# EAGLE board homeboard17 (EAGLE 6.0)
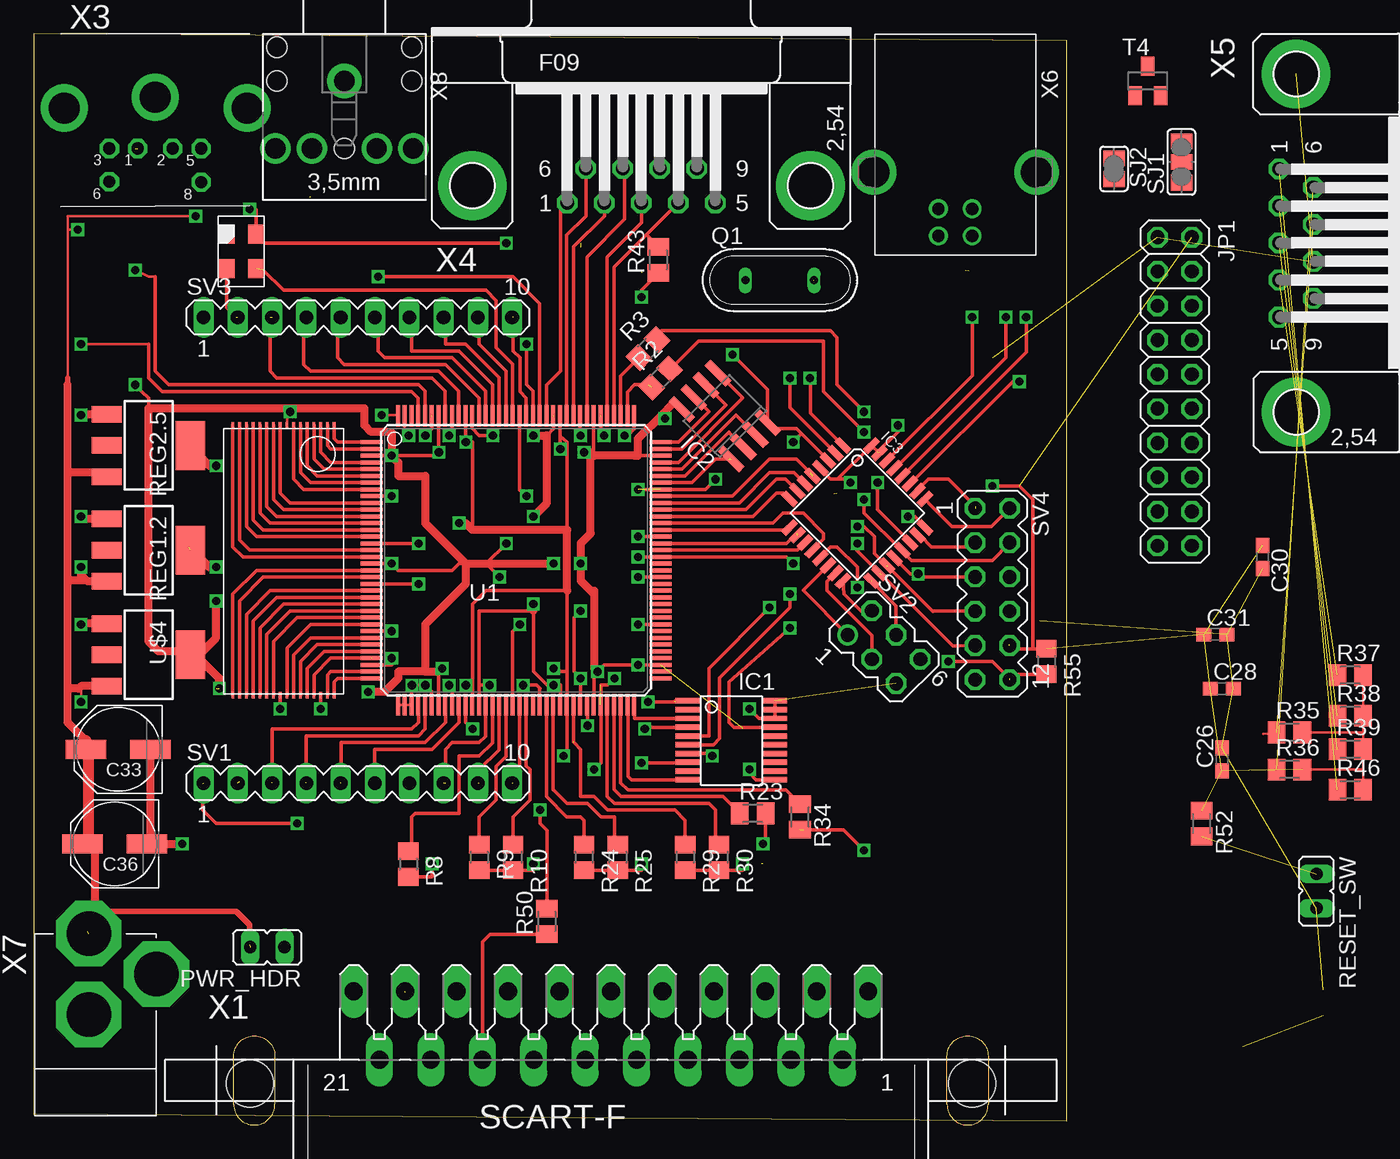
[diagram p0: board, top side]
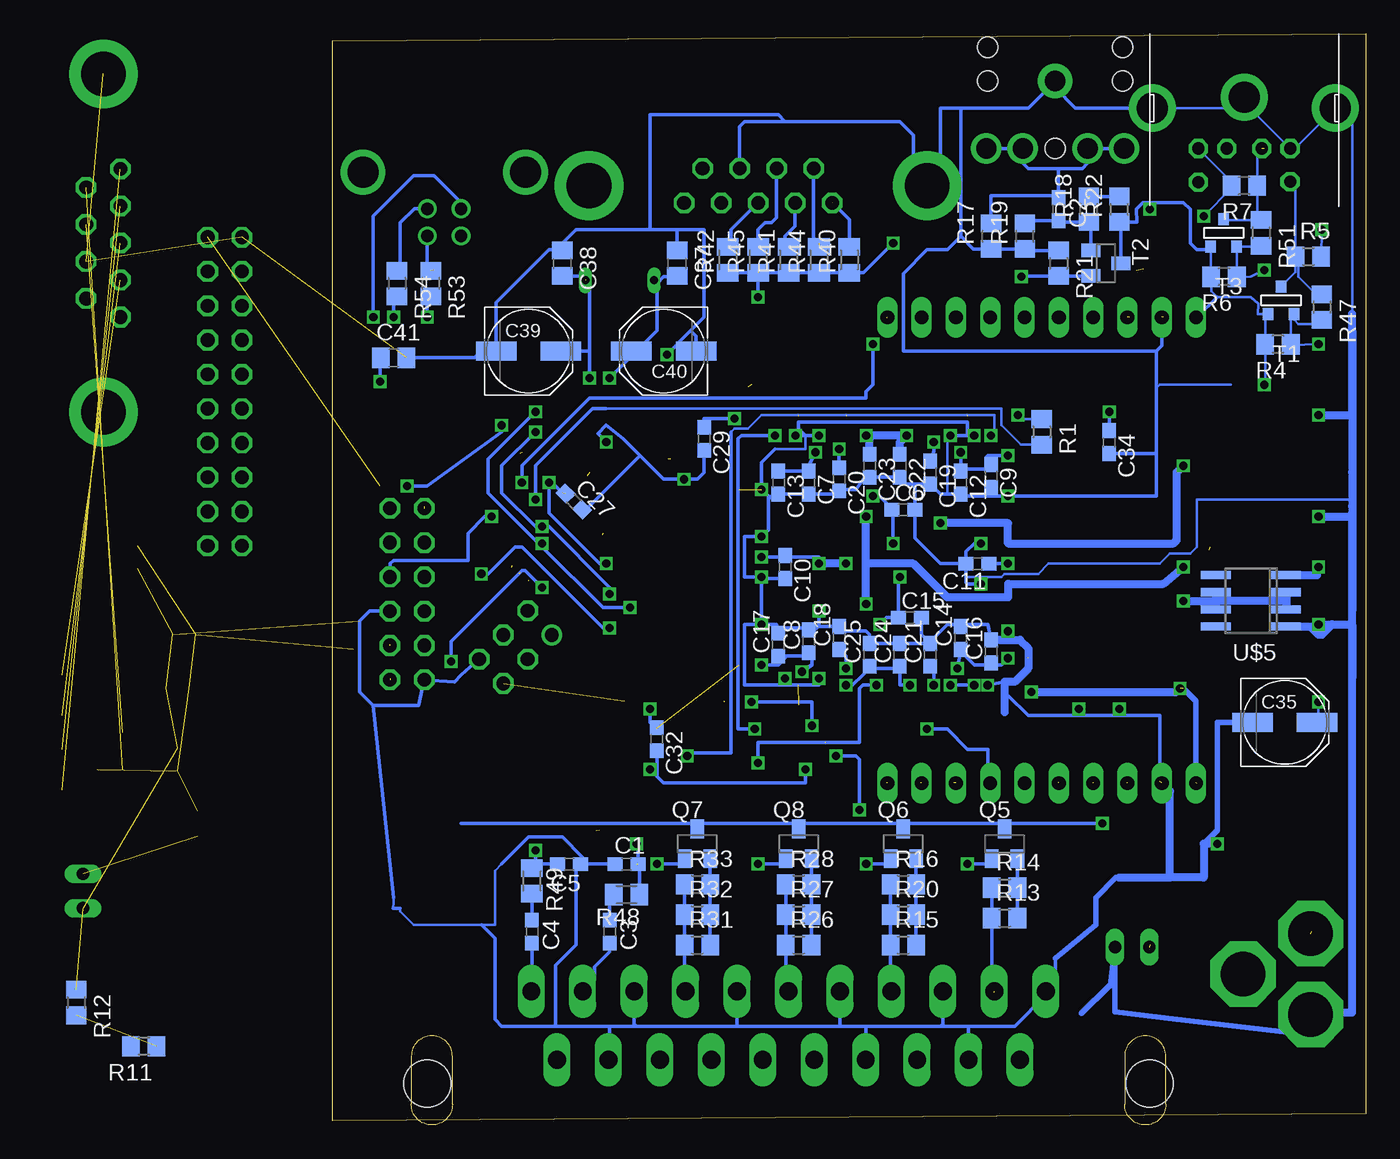
[diagram p1: board, bottom side, seen from below]

Size 76.5 x 80.5 mm. Coordinates in mm from the lower left corner, seen from the top.
Outline: 0,0.5 76.5,0 76.5,80 0,80.5 0,0.5
Copper layers (1*16): Top 0.0356mm / dielectric 1.5011mm / Bottom 0.0356mm
Design rules: minimum track width 6mil, minimum drill 13mil, track to track 6mil, track to pad 6mil, pad to pad 6mil, via to via 6mil, smd to smd 6mil, copper to edge 15mil, drill to drill 6mil, minimum pad ring 7mil, minimum via ring 7mil, stop-mask expansion 4mil, vias tented up to drill 0mil, thermal gap 10mil
Net classes: 1 power: width 0.6 mm, drill 1.1 mm, clearance 0.4 mm; 2 gnd: width 0.305 mm, drill 0.508 mm, clearance 0.152 mm

## Footprints (pad centres in the part's own frame; a part is rotated, then mirrored left to right if it is on the bottom)
C0603 = smd 1.1 x 1: 1 -0.85,0; 2 0.85,0
PANASONIC_D = smd 3 x 1.4: + 2.4,0; - -2.4,0
C0805 = smd 1.3 x 1.5: 1 -0.95,0; 2 0.95,0
VO20 = smd 0.4 x 1.8: 1 5.85,6.15; 2 5.2,6.15; 3 4.55,6.15; 4 3.9,6.15; 5 3.25,6.15; 6 2.6,6.15; 7 1.95,6.15; 8 1.3,6.15; 9 0.65,6.15; 10 0,6.15; 11 0,-0.3; 12 0.65,-0.3; 13 1.3,-0.3; 14 1.95,-0.3; 15 2.6,-0.3; 16 3.25,-0.3; 17 3.9,-0.3; 18 4.55,-0.3; 19 5.2,-0.3; 20 5.85,-0.3
SO-08 = smd 0.6 x 2.2: 1 -1.905,-2.6; 2 -0.635,-2.6; 3 0.635,-2.6; 4 1.905,-2.6; 5 1.905,2.6; 6 0.635,2.6; 7 -0.635,2.6; 8 -1.905,2.6
TQFP32-08 = smd 1.27 x 0.508: 1 -4.293,2.8; 2 -4.293,2; 3 -4.293,1.2; 4 -4.293,0.4; 5 -4.293,-0.4; 6 -4.293,-1.2; 7 -4.293,-2; 8 -4.293,-2.8; 17 4.293,-2.8; 18 4.293,-2; 19 4.293,-1.2; 20 4.293,-0.4; 21 4.293,0.4; 22 4.293,1.2; 23 4.293,2; 24 4.293,2.8 | smd 0.508 x 1.27: 9 -2.8,-4.293; 10 -2,-4.293; 11 -1.2,-4.293; 12 -0.4,-4.293; 13 0.4,-4.293; 14 1.2,-4.293; 15 2,-4.293; 16 2.8,-4.293; 25 2.8,4.293; 26 2,4.293; 27 1.2,4.293; 28 0.4,4.293; 29 -0.4,4.293; 30 -1.2,4.293; 31 -2,4.293; 32 -2.8,4.293
2X10 = drill 1.016 octagon: 1 -11.43,-1.27; 2 -11.43,1.27; 3 -8.89,-1.27; 4 -8.89,1.27; 5 -6.35,-1.27; 6 -6.35,1.27; 7 -3.81,-1.27; 8 -3.81,1.27; 9 -1.27,-1.27; 10 -1.27,1.27; 11 1.27,-1.27; 12 1.27,1.27; 13 3.81,-1.27; 14 3.81,1.27; 15 6.35,-1.27; 16 6.35,1.27; 17 8.89,-1.27; 18 8.89,1.27; 19 11.43,-1.27; 20 11.43,1.27
JP1 = drill 0.914 long: 1 0,-1.27; 2 0,1.27
QS = drill 0.61 long: 1 -2.54,0; 2 2.54,0
SOT23 = smd 1 x 1.4: 1 -0.95,-1.1; 2 0.95,-1.1; 3 0,1.1
R0805 = smd 1.3 x 1.5: 1 -0.95,0; 2 0.95,0
M0805 = smd 1.3 x 1.6: 1 -0.95,0; 2 0.95,0
SOT223 = smd 1.219 x 2.235: 1 -2.311,-3.099; 2 0,-3.099; 3 2.311,-3.099 | smd 3.6 x 2.2: 4 0,3.099
SJ_2 = smd 1.168 x 1.6: 1 -1.524,0; 2 0,0; 3 1.524,0
SJ = smd 1.168 x 1.6: 1 -0.762,0; 2 0.762,0
MA10-1 = drill 1.016 long: 1 -11.43,0; 2 -8.89,0; 3 -6.35,0; 4 -3.81,0; 5 -1.27,0; 6 1.27,0; 7 3.81,0; 8 6.35,0; 9 8.89,0; 10 11.43,0
MA03-2 = drill 1.016: 1 -2.54,-1.27 | drill 1.016 octagon: 2 -2.54,1.27; 3 0,-1.27; 4 0,1.27; 5 2.54,-1.27; 6 2.54,1.27
MA06-2 = drill 1.016 octagon: 1 -6.35,-1.27; 2 -6.35,1.27; 3 -3.81,-1.27; 4 -3.81,1.27; 5 -1.27,-1.27; 6 -1.27,1.27; 7 1.27,-1.27; 8 1.27,1.27; 9 3.81,-1.27; 10 3.81,1.27; 11 6.35,-1.27; 12 6.35,1.27
SOT-23 = smd 0.787 x 0.889: 1 0.025,-1.016; 2 -0.94,1.016; 3 0.991,1.016
TQ144 = smd 1.6 x 0.3: P1 -10.7,8.75; P2 -10.7,8.25; P3 -10.7,7.75; P4 -10.7,7.25; P5 -10.7,6.75; P6 -10.7,6.25; P7 -10.7,5.75; P8 -10.7,5.25; P9 -10.7,4.75; P10 -10.7,4.25; P11 -10.7,3.75; P12 -10.7,3.25; P13 -10.7,2.75; P14 -10.7,2.25; P15 -10.7,1.75; P16 -10.7,1.25; P17 -10.7,0.75; P18 -10.7,0.25; P19 -10.7,-0.25; P20 -10.7,-0.75; P21 -10.7,-1.25; P22 -10.7,-1.75; P23 -10.7,-2.25; P24 -10.7,-2.75; P25 -10.7,-3.25; P26 -10.7,-3.75; P27 -10.7,-4.25; P28 -10.7,-4.75; P29 -10.7,-5.25; P30 -10.7,-5.75; P31 -10.7,-6.25; P32 -10.7,-6.75; P33 -10.7,-7.25; P34 -10.7,-7.75; P35 -10.7,-8.25; P36 -10.7,-8.75; P73 10.7,-8.75; P74 10.7,-8.25; P75 10.7,-7.75; P76 10.7,-7.25; P77 10.7,-6.75; P78 10.7,-6.25; P79 10.7,-5.75; P80 10.7,-5.25; P81 10.7,-4.75; P82 10.7,-4.25; P83 10.7,-3.75; P84 10.7,-3.25; P85 10.7,-2.75; P86 10.7,-2.25; P87 10.7,-1.75; P88 10.7,-1.25; P89 10.7,-0.75; P90 10.7,-0.25; P91 10.7,0.25; P92 10.7,0.75; P93 10.7,1.25; P94 10.7,1.75; P95 10.7,2.25; P96 10.7,2.75; P97 10.7,3.25; P98 10.7,3.75; P99 10.7,4.25; P100 10.7,4.75; P101 10.7,5.25; P102 10.7,5.75; P103 10.7,6.25; P104 10.7,6.75; P105 10.7,7.25; P106 10.7,7.75; P107 10.7,8.25; P108 10.7,8.75 | smd 0.3 x 1.6: P37 -8.75,-10.7; P38 -8.25,-10.7; P39 -7.75,-10.7; P40 -7.25,-10.7; P41 -6.75,-10.7; P42 -6.25,-10.7; P43 -5.75,-10.7; P44 -5.25,-10.7; P45 -4.75,-10.7; P46 -4.25,-10.7; P47 -3.75,-10.7; P48 -3.25,-10.7; P49 -2.75,-10.7; P50 -2.25,-10.7; P51 -1.75,-10.7; P52 -1.25,-10.7; P53 -0.75,-10.7; P54 -0.25,-10.7; P55 0.25,-10.7; P56 0.75,-10.7; P57 1.25,-10.7; P58 1.75,-10.7; P59 2.25,-10.7; P60 2.75,-10.7; P61 3.25,-10.7; P62 3.75,-10.7; P63 4.25,-10.7; P64 4.75,-10.7; P65 5.25,-10.7; P66 5.75,-10.7; P67 6.25,-10.7; P68 6.75,-10.7; P69 7.25,-10.7; P70 7.75,-10.7; P71 8.25,-10.7; P72 8.75,-10.7; P109 8.75,10.7; P110 8.25,10.7; P111 7.75,10.7; P112 7.25,10.7; P113 6.75,10.7; P114 6.25,10.7; P115 5.75,10.7; P116 5.25,10.7; P117 4.75,10.7; P118 4.25,10.7; P119 3.75,10.7; P120 3.25,10.7; P121 2.75,10.7; P122 2.25,10.7; P123 1.75,10.7; P124 1.25,10.7; P125 0.75,10.7; P126 0.25,10.7; P127 -0.25,10.7; P128 -0.75,10.7; P129 -1.25,10.7; P130 -1.75,10.7; P131 -2.25,10.7; P132 -2.75,10.7; P133 -3.25,10.7; P134 -3.75,10.7; P135 -4.25,10.7; P136 -4.75,10.7; P137 -5.25,10.7; P138 -5.75,10.7; P139 -6.25,10.7; P140 -6.75,10.7; P141 -7.25,10.7; P142 -7.75,10.7; P143 -8.25,10.7; P144 -8.75,10.7
OSC_7C = smd 1.4 x 1.2: ENA -1.27,-1.1; GND 1.27,-1.1; OUT 1.27,1.1; VDD -1.27,1.1
SO8 = smd 0.6 x 2.2: 1 -1.905,-2.6; 2 -0.635,-2.6; 3 0.635,-2.6; 4 1.905,-2.6; 5 1.905,2.6; 6 0.635,2.6; 7 -0.635,2.6; 8 -1.905,2.6
TSOP32 = smd 0.5 x 0.2: P1 -9.75,3.75; P2 -9.75,3.25; P3 -9.75,2.75; P4 -9.75,2.25; P5 -9.75,1.75; P6 -9.75,1.25; P7 -9.75,0.75; P8 -9.75,0.25; P9 -9.75,-0.25; P10 -9.75,-0.75; P11 -9.75,-1.25; P12 -9.75,-1.75; P13 -9.75,-2.25; P14 -9.75,-2.75; P15 -9.75,-3.25; P16 -9.75,-3.75; P17 10.25,-3.75; P18 10.25,-3.25; P19 10.25,-2.75; P20 10.25,-2.25; P21 10.25,-1.75; P22 10.25,-1.25; P23 10.25,-0.75; P24 10.25,-0.25; P25 10.25,0.25; P26 10.25,0.75; P27 10.25,1.25; P28 10.25,1.75; P29 10.25,2.25; P30 10.25,2.75; P31 10.25,3.25; P32 10.25,3.75
SCART-CLIP = drill 1.321 long: 1 19.05,5.08; 2 17.145,0; 3 15.24,5.08; 4 13.335,0; 5 11.43,5.08; 6 9.525,0; 7 7.62,5.08; 8 5.715,0; 9 3.81,5.08; 10 1.905,0; 11 0,5.08; 12 -1.905,0; 13 -3.81,5.08; 14 -5.715,0; 15 -7.62,5.08; 16 -9.525,0; 17 -11.43,5.08; 18 -13.335,0; 19 -15.24,5.08; 20 -17.145,0; 21 -19.05,5.08 | hole 3.5: 26.75,-1.75; -26.75,-1.75
M_DIN6 = drill 0.9 pad 1.422 octagon: 1 -1.3,-3.75; 2 1.3,-3.75; 3 -3.4,-3.75; 5 3.4,-3.75; 6 -3.4,-6.2; 8 3.4,-6.25 | drill 2.3 pad 3.5: SH1 6.8,-0.75; SH2 0,0.05; SH3 -6.75,-0.75
F09HP = drill 1.016 octagon: 1 -5.486,-1.27; 2 -2.743,-1.27; 3 0,-1.27; 4 2.743,-1.27; 5 5.486,-1.27; 6 -4.115,1.27; 7 -1.372,1.27; 8 1.372,1.27; 9 4.115,1.27 | drill 3.302 pad 5.08: G1 -12.522,0; G2 12.522,0
85-32004-10X = drill 0.92 pad 1.27: 1 4.71,-1.25; 2 4.71,1.25; 3 2.71,1.25; 4 2.71,-1.25 | drill 2.3 pad 3: M1 0,6.02; M2 0,-6.02
DC-21MM = drill 3.302 pad 4.826 octagon: 1 -5.08,-3.353; 2 -0.076,-6.35; 3 -0.076,-0.356
20-0137 = drill 1.5 pad 2.54: 1 -5,0 | drill 1.5: 2 0,5.1; 3 0,2.4; 4 0,-2.4; 5 0,-5.1 | hole 1.5: -5,5; -5,-5; 0,0; -7.5,5; -7.5,-5

## Placement (x,y rotation side)
C1  [C0603]  54.75,19 0 bottom
C2  100nF  [C0603]  22.75,67.5 270 bottom
C3  [C0603]  56,14 270 bottom
C4  [C0603]  61.75,14 270 bottom
C5  [C0603]  59,19 180 bottom
C6  100nF  [C0603]  34.25,45.25 0 bottom
C7  100nF  [C0603]  41.25,47.25 270 bottom
C8  100nF  [C0603]  41.25,35.5 90 bottom
C9  100nF  [C0603]  27.75,47.75 270 bottom
C10  100nF  [C0603]  43,41 270 bottom
C11  100nF  [C0603]  28.75,41.25 180 bottom
C12  100nF  [C0603]  30,47.25 270 bottom
C13  100nF  [C0603]  43.5,47.25 270 bottom
C14  100nF  [C0603]  30,35.75 90 bottom
C15  100nF  [C0603]  33.75,37.25 0 bottom
C16  100nF  [C0603]  27.75,34.75 90 bottom
C17  100nF  [C0603]  43.5,35.25 90 bottom
C18  100nF  [C0603]  39,35.75 90 bottom
C19  100nF  [C0603]  32.25,48 270 bottom
C20  100nF  [C0603]  39,47.5 270 bottom
C21  100nF  [C0603]  32.25,34.5 90 bottom
C22  100nF  [C0603]  34.5,48.5 270 bottom
C23  100nF  [C0603]  36.75,48.5 270 bottom
C24  100nF  [C0603]  34.5,34.5 90 bottom
C25  100nF  [C0603]  36.75,34.5 90 bottom
C26  100nF  [C0603]  88,26.75 90 top  (outside the outline)
C27  100nF  [C0603]  58.65,45.85 315 bottom
C28  100nF  [C0603]  88,32 0 top  (outside the outline)
C29  100nF  [C0603]  49,50.5 270 bottom
C30  100nF  [C0603]  91,41.75 270 top  (outside the outline)
C31  100nF  [C0603]  87.5,36 0 top  (outside the outline)
C32  100nF  [C0603]  52.5,28.25 270 bottom
C33  100u  [PANASONIC_D]  6.25,27.5 180 top
C34  100nF  [C0603]  19,50.25 270 bottom
C35  100u  [PANASONIC_D]  6,29.5 0 bottom
C36  100u  [PANASONIC_D]  6,20.5 180 top
C37  [C0805]  51,63.5 270 bottom
C38  [C0805]  59.5,63.5 270 bottom
C39  100u  [PANASONIC_D]  62,57 0 bottom
C40  100u  [PANASONIC_D]  52,57 180 bottom
C41  1uF  [C0805]  72,56.5 0 bottom
IC1  XCF02S  [VO20]  54.59,25.24 90 top
IC2  25LC080SN  [SO-08]  51.17,52.18 45 top
IC3  ATMEGA32U2-TQFP  [TQFP32-08]  61,45 315 top
JP1  [2X10]  84.5,54 270 top  (outside the outline)
PWR_HDR  [JP1]  17.3,12.84 90 top
Q1  [QS]  55.25,62.25 0 top
Q5  BC848SMD  [SOT23]  26.75,20.5 0 bottom
Q6  BC848SMD  [SOT23]  34.25,20.5 0 bottom
Q7  BC848SMD  [SOT23]  49.5,20.5 0 bottom
Q8  BC848SMD  [SOT23]  42,20.5 0 bottom
R1  100  [R0805]  24,51.01 270 bottom
R2  100  [R0805]  46.42,55 45 top
R3  100  [R0805]  45.49,57.18 45 top
R4  1000  [R0805]  6.5,57.5 180 bottom
R5  1000  [R0805]  4.25,64 0 bottom
R6  1000  [R0805]  10.5,62.5 180 bottom
R7  1000  [R0805]  9,69.25 180 bottom
R8  2200  [R0805]  27.75,19 270 top
R9  2200  [R0805]  33,19.5 270 top
R10  1000  [R0805]  35.5,19.5 270 top
R11  75  [R0805]  90.5,5.5 180 bottom  (outside the outline)
R12  750  [R0805]  95.5,8.75 270 bottom  (outside the outline)
R13  680  [R0805]  26.75,15 0 bottom
R14  2200  [R0805]  26.75,17.25 0 bottom
R15  270  [R0805]  34.25,13 0 bottom
R16  680  [R0805]  34.25,17.5 0 bottom
R17  10000  [R0805]  27.75,65.5 90 bottom
R18  4700  [R0805]  20.5,67.5 90 bottom
R19  10000  [R0805]  25.25,65.5 90 bottom
R20  4700  [R0805]  34.25,15.25 0 bottom
R21  47000  [R0805]  22.75,63.5 270 bottom
R22  1000  [R0805]  18.25,67.5 90 bottom
R23  [M0805]  53.25,22.75 0 top
R24  2200  [R0805]  40.75,19.5 270 top
R25  1000  [R0805]  43.25,19.5 270 top
R26  270  [R0805]  42,13 0 bottom
R27  680  [R0805]  42,15.25 0 bottom
R28  4700  [R0805]  42,17.5 0 bottom
R29  2200  [R0805]  48.25,19.5 270 top
R30  1000  [R0805]  50.75,19.5 270 top
R31  270  [R0805]  49.5,13 0 bottom
R32  680  [R0805]  49.5,15.25 0 bottom
R33  4700  [R0805]  49.5,17.5 0 bottom
R34  [M0805]  56.75,22.5 270 top
R35  [M0805]  93,28.75 0 top  (outside the outline)
R36  [M0805]  93,26 0 top  (outside the outline)
R37  [M0805]  97.5,33 0 top  (outside the outline)
R38  [M0805]  97.5,30 0 top  (outside the outline)
R39  [M0805]  97.5,27.5 0 top  (outside the outline)
R40  [M0805]  38.25,63.75 90 bottom
R41  [M0805]  42.75,63.75 90 bottom
R42  [M0805]  47.25,63.75 90 bottom
R43  [M0805]  46.25,63.75 90 top
R44  [M0805]  40.5,63.75 90 bottom
R45  [M0805]  45,63.75 90 bottom
R46  [M0805]  97.5,24.5 0 top  (outside the outline)
R47  270  [R0805]  3.25,60.25 270 bottom
R48  [M0805]  54.75,16.75 180 bottom
R49  [M0805]  61.75,17.75 270 bottom
R50  2k2  [M0805]  38,14.75 90 top
R51  270  [R0805]  7.75,65.75 270 bottom
R52  4K7  [M0805]  86.5,22 270 top  (outside the outline)
R53  22  [R0805]  69.25,62 270 bottom
R54  22  [R0805]  71.75,62 270 bottom
R55  4700  [R0805]  75,34 270 top
REG1.2  1.2V  [SOT223]  8.5,42.25 270 top
REG2.5  2.5V  [SOT223]  8.5,50 270 top
RESET_SW  [JP1]  95,17 180 top  (outside the outline)
SJ1  [SJ_2]  85,71 90 top  (outside the outline)
SJ2  [SJ]  80,70.5 270 top  (outside the outline)
SV1  [MA10-1]  24,25 0 top
SV2  [MA03-2]  62.97,35.07 315 top
SV3  [MA10-1]  24,59.5 0 top
SV4  [MA06-2]  71,39 270 top
T1  BSS138  [SOT-23]  6.25,60.75 180 bottom
T2  BC848  [SOT23]  19.25,63.5 270 bottom
T3  BSS138  [SOT-23]  10.5,65.75 180 bottom
T4  BC848  [SOT23]  82.5,77 0 top  (outside the outline)
U1  XC3S400TQ144  [TQ144]  35.72,41.5 0 top
U$2  TXO_7C  [OSC_7C]  15.38,64.38 270 top
U$4  3.3V  [SOT223]  8.5,34.5 270 top
U$5  MC33269D  [SO8]  8.5,38.5 90 bottom
U$6  AS6C4008  [TSOP32]  18.5,41.75 270 top
X1  SCART-CLIP  [SCART-CLIP]  42.75,4.5 0 top
X3  [M_DIN6]  9,75.75 0 top
X4  [F09HP]  45,69.25 0 top
X5  [F09HP]  93.5,65 270 top  (outside the outline)
X6  MINI-USB_4P-85-32004-10X  [85-32004-10X]  68.25,70.25 270 top
X7  DC21MMX  [DC-21MM]  4,7.5 180 top
X8  STEREOJACK  [20-0137]  23,72 270 top

## Library data of the parts
C1-C5 R23 R34-R46 R48-R50 R52 = resistor
C6-C41 R1-R22 R24-R33 R47 R51 R53-R55 = rcl
IC1 = smd-special
IC2 = microchip; MF: MICROCHIP; MPN: 25LC080/SN; OC_FARNELL: 1137302; OC_NEWARK: 96K4092
IC3 = adafruit
JP1 = pinhead
PWR_HDR RESET_SW SJ1 SJ2 = jumper
Q1 = special
Q5-Q8 = bc548
REG1.2 REG2.5 U$2 U$4-U$6 X8 = cpcfpga
SV1-SV4 = con-lstb; OC_FARNELL: unknown; OC_NEWARK: unknown
T1 T3 = zetex; OC_FARNELL: unknown; OC_NEWARK: unknown
T2 T4 = transistor
U1 = xilinx_spartan3_virtex4_and_5
X1 = cpcfpga; OC_FARNELL: unknown; OC_NEWARK: unknown
X3 = mini_din
X4 X5 = con-subd; OC_FARNELL: unknown; OC_NEWARK: unknown
X6 = con-cypressindustries; OC_FARNELL: unknown; OC_NEWARK: unknown
X7 = powersupply

## Nets
1: X7.1
AA: SV1.6 U1.P46
ABAB: SV1.8 U1.P50
AINLEFT: X1.6
AINRIGHT: X1.2
AT_RESET: IC3.24 SV4.6
B0: R30.1 U1.P68
B1: R29.1 U1.P63
BB: SV1.7 U1.P47
CASIN: R21.2 T2.2 U1.P123
CLK16: U1.P127 U$2.OUT
CLK_5V: R5.1 R47.1 T1.1 X3.6
COMPIN: X1.20
CSYNC: R8.1 U1.P51
D_FASTBLANKING: R11.1 R12.2
DATA_5V: R7.1 R51.1 T3.1 X3.1
EMER_BOOT: IC3.13 R55.2 SV4.12
EXTCLK: SJ1.3
FL_DI: IC2.5 U1.P105
FL_DO: IC2.2 U1.P103
FL_HOLD: IC2.7 U1.P108
FL_SCLK: IC2.6 U1.P107
FL_SEL: IC2.1 U1.P102
FL_WP: IC2.3 U1.P104
FPGA_AUDIO_LEFT: R23.1 U1.P69
FPGA_AUDIO_RIGHT: R34.1 U1.P70
FPGA_RESET: IC3.22 U1.P124
G0: R25.1 U1.P60
G1: R24.1 U1.P59
GND: C1.1 C5.1 C6.2 C7.2 C8.2 C9.2 C10.2 C11.2 C12.2 C13.2 C14.2 C15.2 C16.2 C17.2 C18.2 C19.2 C20.2 C21.2 C22.2 C23.2 C24.2 C25.2 C26.2 C27.2 C28.2 C29.2 C30.2 C31.2 C32.2 C33.- C34.2 C35.- C36.- C37.1 C38.1 C39.- C40.- C41.2 IC1.11 IC2.4 IC3.3 JP1.1 PWR_HDR.1 R12.1 R17.1 R19.1 R21.1 REG1.2.1 REG2.5.1 RESET_SW.2 SV1.2 SV2.6 SV3.2 SV4.8 SV4.11 U1.P9 U1.P16 U1.P22 U1.P29 U1.P37 U1.P38 U1.P39 U1.P42 U1.P45 U1.P64 U1.P67 U1.P81 U1.P88 U1.P94 U1.P101 U1.P114 U1.P117 U1.P136 U1.P139 U$2.GND U$4.1 U$5.1 U$6.P24 U$6.P30 X1.4 X1.5 X1.9 X1.13 X1.14 X1.17 X1.18 X1.21 X3.3 X3.SH1 X3.SH2 X3.SH3 X4.8 X4.G1 X5.8 X5.G1 X7.3 X8.1
JOY0_DOWN: R41.2 U1.P118 X4.2
JOY0_FIRE1: R45.2 U1.P116 X4.7
JOY0_FIRE2: R44.2 U1.P119 X4.6
JOY0_LEFT: R42.2 U1.P113 X4.3
JOY0_RIGHT: R43.2 U1.P112 X4.4
JOY0_UP: R40.2 U1.P122 X4.1
JOY1_DOWN: R39.1 X5.2
JOY1_FIRE1: R35.1 X5.7
JOY1_FIRE2: R36.1 X5.6
JOY1_LEFT: R38.1 X5.3
JOY1_RIGHT: R37.1 X5.4
JOY1_UP: R46.1 X5.1
N$1: SV3.3 U1.P137
N$2: SV3.4 U1.P135
N$3: SV3.5 U1.P132
N$4: SV3.6 U1.P131
N$5: SV3.7 U1.P130
N$6: SV3.8 U1.P129
N$7: SV3.9 U1.P128
N$8: SV3.10 U1.P125
N$9: C41.1 IC3.27
N$12: C37.2 C40.+ IC3.2 Q1.1
N$14: C38.2 C39.+ IC3.1 Q1.2
N$35: IC1.3 U1.P72
N$36: R53.1 X6.2
N$38: IC1.10 U1.P71
N$39: R2.1 U1.P110
N$40: IC1.7 U1.P143
N$42: R1.1 U1.P144
N$43: R3.1 U1.P111
N$49: IC3.29 R54.2
N$50: REG2.5.2
N$51: C1.2 R23.2 R48.1
N$52: C3.1 R48.2
N$53: Q6.1 R9.2 R10.2
N$54: Q6.2 R15.2 R16.2 R20.2
N$55: Q8.1 R24.2 R25.2
N$56: Q8.2 R26.2 R27.2 R28.2
N$57: Q7.1 R29.2 R30.2
N$58: Q7.2 R31.2 R32.2 R33.2
N$59: Q5.2 R13.2 R14.2
N$60: C2.2 R18.1 R19.2 T2.1
N$61: C2.1 R17.2 X8.2 X8.3 X8.4 X8.5
N$62: R18.2 R22.2
N$63: Q5.1 R8.2
N$64: C4.1 R49.2
N$65: C5.2 R34.2 R49.1
N$66: R54.1 X6.3
N$67: U1.P1 U$6.P1
N$68: IC3.30 R53.2
N$69: IC3.28 X6.4
N$70: REG1.2.2
N$71: U1.P2 U$6.P2
N$72: U1.P4 U$6.P3
N$73: U1.P5 U$6.P4
N$74: U1.P6 U$6.P5
N$75: U1.P7 U$6.P6
N$76: U1.P8 U$6.P7
N$77: U1.P10 U$6.P9
N$78: U1.P11 U$6.P10
N$79: U1.P12 U$6.P11
N$80: U1.P13 U$6.P12
N$81: U1.P14 U$6.P13
N$82: U1.P15 U$6.P14
N$83: U1.P17 U$6.P15
N$84: U1.P18 U$6.P16
N$85: U1.P20 U$6.P17
N$86: U1.P21 U$6.P18
N$87: U1.P23 U$6.P19
N$88: U1.P24 U$6.P20
N$89: U1.P25 U$6.P21
N$90: U1.P26 U$6.P22
N$91: U1.P27 U$6.P23
N$92: U1.P28 U$6.P25
N$93: U1.P30 U$6.P26
N$94: U1.P31 U$6.P27
N$95: U1.P32 U$6.P28
N$96: U1.P33 U$6.P29
N$97: U1.P35 U$6.P31
N$98: U1.P36 U$6.P32
N$99: SV1.3 U1.P40
N$100: SV1.4 U1.P41
N$101: SV1.5 U1.P44
PC2: IC3.5 U1.P100
PC4: IC3.26 SV4.1
PC5: IC3.25 SV4.2
PD0: IC3.6 U1.P99
PD1: IC3.7 U1.P98
PD2: IC3.8 U1.P97
PD3: IC3.9 U1.P95
PD4: IC3.10 U1.P93
PD5: IC3.11 U1.P92
PD6: IC3.12 U1.P96
PROM_DO: IC1.1 U1.P65
PROM_INITB: IC1.8 U1.P58
PS2CLK: R4.1 R47.2 T1.2 U1.P141
PS2DAT: R6.1 R51.2 T3.2 U1.P140
R0: R10.1 U1.P56
R1: R9.1 U1.P53
RESET: R52.2 RESET_SW.1
SAA: SV1.9 U1.P52
SCART_BLANKING: R50.1 X1.16
SCART_BLUE: R31.1 R32.1 R33.1 X1.7
SCART_COMP: R13.1 R14.1 X1.19
SCART_GREEN: R26.1 R27.1 R28.1 X1.11
SCART_LEFT: C3.2 X1.3
SCART_MODE: X1.8
SCART_RED: R15.1 R16.1 R20.1 X1.15
SCART_RIGHT: C4.2 X1.1
SPI_MISO: IC3.17 SV2.4
SPI_MOSI: IC3.16 SV2.2
SPI_SCLK: IC3.15 SV2.3
SPI_SEL: IC3.14 SV2.1
TCK: IC1.6 IC3.19 R2.2 SV4.7
TDI_FPGA: IC3.21 R1.2 SV4.4
TDO_EXP: IC3.23 SV4.3
TDO_FPGA: IC1.4 U1.P109
TDO_PROM: IC1.17 IC3.20 SV4.5
TMS: IC1.5 IC3.18 R3.2 SV4.9
VCC: C6.1 C7.1 C8.1 C9.1 C10.1 C11.1 C12.1 C13.1 C14.1 C15.1 C16.1 C17.1 C26.1 C27.1 C28.1 C29.1 C30.1 C31.1 C32.1 C34.1 IC1.18 IC1.19 IC1.20 IC2.8 IC3.4 IC3.31 IC3.32 JP1.2 Q5.3 Q6.3 Q7.3 Q8.3 R4.2 R6.2 R22.1 R35.2 R36.2 R37.2 R38.2 R39.2 R40.1 R41.1 R42.1 R43.1 R44.1 R45.1 R46.2 R52.1 R55.1 SV1.1 SV2.5 SV3.1 SV4.10 T1.3 T2.3 T3.3 U1.P3 U1.P19 U1.P34 U1.P43 U1.P54 U1.P66 U1.P75 U1.P91 U1.P106 U1.P115 U1.P126 U1.P138 U$2.VDD U$4.4 U$5.2 U$5.3 U$5.6 U$5.7 U$6.P8
VCC5: C33.+ C35.+ C36.+ PWR_HDR.2 R5.2 R7.2 REG1.2.3 REG2.5.3 U$4.3 U$5.4 X3.5 X7.2
VCC_B3: R11.2
VCCAUX: C18.1 C19.1 C20.1 C21.1 R50.2 REG2.5.4 U1.P48 U1.P62 U1.P120 U1.P134
VCCINT: C22.1 C23.1 C24.1 C25.1 REG1.2.4 U1.P49 U1.P61 U1.P121 U1.P133
XXX: SV1.10 U1.P55

## Tracks (layer width: path | path; a pad name or v marks a point on that pad's centre or on a via)
AA
  Top 0.254: U1.P46 31.5,30.3 31.5,29.5 29.5,27.5 25.25,27.5 25.25,25.02 SV1.6
ABAB  (1 unrouted)
  Top 0.254: U1.P50 33.47,28.47 33,28 31,28 30.5,27.5 30.5,25
AT_RESET  (via drill 0.6)
  Top 0.254: IC3.24 66.02,43.98 65.25,44.75 v64.75,44.75
  Bottom 0.254: v64.75,44.75 65.25,44.75 66.5,43.5 66.5,41.5 72,41.5 72.25,41.25 72.25,41 | 72.25,41 72.25,40.27 | SV4.6 72.27,40.98 72.25,41
B0
  Top 0.254: U1.P68 42.47,24.03 43,23.5 50,23.5 50.5,23 50.5,20.7 R30.1
B1  (1 unrouted)
  Top 0.254: U1.P63 39.97,28.03 | R29.1 48.25,22.25 47.5,23 42.5,23 41.5,24 40.5,24 40.5,27.5 40,28
BB  (via drill 0.6)
  Top 0.254: U1.P47 32,30.3 32,29.5 v32.5,29
  Bottom 0.254: v32.5,29 31,29 29.5,27.5 28,27.5 28,25.19 SV1.7
CASIN  (via drill 0.6)
  Top 0.254: U1.P123 37.47,60.53 35.5,62.5 v25.5,62.5
  Bottom 0.254: T2.2 R21.2 25.45,62.55 v25.5,62.5
CLK16  (1 unrouted)
  Top 0.254: U1.P127 35.47,56.03 34.25,57.25 34.25,60.75 33.5,61.5 18.5,61.5 17,63
CLK_5V
  Bottom 0.2: R5.1 5.2,69.15 X3.6 | R47.1 3.7,61.2 5,62.5 5,64 R5.1 | R5.1 5.2,62.84 T1.1
CSYNC
  Top 0.254: U1.P51 33.97,27.97 33,27 31.5,27 31.5,22.75 28.25,22.75 28,22.5 28,20.2 R8.1
D_FASTBLANKING  (1 unrouted)
DATA_5V  (1 unrouted)
  Bottom 0.2: T3.1 10.46,66.7 R51.1 8.05,67 R7.1 8.05,71.45 7.5,72
EMER_BOOT  (via drill 0.6)  (1 unrouted)
  Top 0.254: IC3.13 58.25,41.75 59,42.5 59.5,42.5 61,41 v61,39.5 | v67.75,34 71,34 72.25,32.75 | R55.2 72.67,33.05 SV4.12
  Bottom 0.254: v61,39.5 62.25,40.75 62.5,40.75 67.75,35.5 v67.75,34
FL_DI
  Top 0.254: U1.P105 47.75,48.75 52.5,53.5 52.5,53.55 IC2.5
FL_DO
  Top 0.254: U1.P103 48.25,47.75 51.5,51 51.5,50.96 IC2.2
FL_HOLD
  Top 0.254: U1.P108 47.75,50.25 50,52.5 49,53.5 48.96,53.5 IC2.7
FL_SCLK
  Top 0.254: U1.P107 48,49.75 51.25,53 IC2.6
FL_SEL  (1 unrouted)
  Top 0.254: U1.P102 48.75,47.25 50.5,49 51.5,49
FL_WP
  Top 0.254: U1.P104 48,48.25 52,52.25 IC2.3
FPGA_AUDIO_LEFT
  Top 0.254: U1.P69 42.97,24.53 43.5,24 51.05,24 R23.1
FPGA_AUDIO_RIGHT
  Top 0.254: U1.P70 43.47,25.03 44,24.5 55.7,24.5 R34.1
FPGA_RESET  (via drill 0.6)
  Top 0.254: U1.P124 36.97,54.03 36.5,54.5 v36.5,57.5 | IC3.22 64.88,42.87 62.5,45.25 v62.5,47.25
  Bottom 0.254: v36.5,57.5 36.5,54.5 37,54 37,53.5 57.5,53.5 62.5,48.5 v62.5,47.25
G0
  Top 0.254: U1.P60 38.47,24.5 38.5,24.5 39.5,23.5 41,23.5 42,22.5 43,22.5 43,20.7 R25.1
G1
  Top 0.254: U1.P59 37.97,24 39.47,22.5 40.5,22.5 40.75,22.25 R24.1
GND  (via drill 0.6)  (15 unrouted)
  Top 0.2: U1.P37 U1.P38 U1.P39
  Top 0.254: U1.P9 v26.5,46.25 | U1.P29 v26.5,36.25 | U1.P22 v28.5,39.75 | U1.P45 30.97,32.22 v30.75,32.25 | U1.P39 27.97,32.22 v28,32.25 v29,32.25 29.47,31.78 U1.P42 | U1.P16 v28.5,42.75 | v29,50.75 29.5,51.25 29.5,52.25 | U1.P136 30.97,51.28 v30.75,50.75 | U1.P81 v44.75,36.75 | U1.P88 v44.75,40.25 | U1.P94 v44.75,43.25 | v43,32.75 42.5,32.25 42,32.25 42,26.5 v41.5,26 | U1.P64 40.5,30.33 v40.5,32.75 40,33.25 40,37.25 v40.5,37.75 | U1.P117 40.47,50.78 v40.5,50.75 | v42.25,50.75 42,50.75 42,52.25 | U$6.P24 v18.25,30.5 | U$6.P30 v21.25,30.5 | U$2.GND 14.28,60.23 15,59.5 | v51.75,56.75 54.36,54.14 IC2.4 54.44,51.69 54.5,51.75 55,51.25 56.5,51.25 56.88,50.88 | IC3.3 58.81,48.94 56.88,50.88 | v56.25,50.25 56.88,50.88 | v53,26 53,25.75 53.5,25.25 IC1.11 | v44.75,46.75 49.75,46.75 v50.5,47.5
  Top 0.6: 5,36.75 5.4,36.75 U$4.1 | 8.65,20.5 C33.- | 8.65,20.5 v11,20.5 | 8.65,20.5 C36.-
  Top 0.61: U$4.1 3.56,36.81 v3.5,36.75 | REG2.5.1 3.56,52.31 v3.5,52.25 | REG1.2.1 3.69,44.56 v3.5,44.75
  Bottom 0.2: 1,59.75 1,74 2,75 X3.SH3 5.25,72 X3.3 9,75.4 X3.SH2 9.8,75 X3.SH1 15.8,76.3 | 1,46 12.5,46 12.5,42.5 13,42 14.5,42 15.25,41.25 23.5,41.25 24.25,40.5 26.75,40.5 27,40.25 29.6,40.25 | 15.5,54.25 15.25,54.5 10,54.5 | 31,50.5 31,46.5 | 64,19 64.5,18.5 64.5,14.5 65.5,14.5 70.5,14.5 71.5,15.5 71.5,15.71 | 72.04,15.71 72,16.17 72,16.5 | 43.75,49.75 41.5,49.75 41.5,50.75
  Bottom 0.254: 71.5,15.71 72.04,15.71 | 73.5,30.75 74.5,31.75 74.5,37 73.77,37.73 SV4.8 | 73.5,30.75 72,16.5 | 28,46.25 v26.5,46.25 15.5,46.25 15.5,49.4 | v28,32.25 26.75,32.5 | v29,32.25 v30.75,32.25 | v26.5,36.25 27.15,35.6 C16.2 28,36.75 30.15,36.75 | C9.2 28,46.25 | v44.75,36.75 43.65,36.75 C17.2 43.25,36.5 41,36.5 C8.2 40.9,36.25 40.55,36.6 40.5,36.6 | v44.75,40.25 44.65,40.15 C10.2 | 44.25,46 44.25,43.75 v44.75,43.25 46,43.25 46,40.25 v44.75,40.25 | 44.25,46 44.25,46.25 v44.75,46.75 44.75,48.75 43.75,49.75 | v43,32.75 43.5,32.25 | 43.5,32.25 46,32.25 46,36.75 v44.75,36.75 | v40.5,32.75 40.5,32.25 43.5,32.25 | C21.2 C24.2 C25.2 36.75,36 37,36.25 38.65,36.25 C18.2 40.5,36.6 | v44.75,36.75 v44.75,40.25 | v40.5,37.75 40.5,36.6 | C15.2 32.9,36 C21.2 | C21.2 32.25,35.5 31,36.75 30.15,36.75 | 30.15,36.75 C14.2 | 31,50.5 v30.75,50.75 29.5,50.75 | 29.5,50.75 v29,50.75 | 39,46.75 37.75,46.75 37.1,47.65 C23.2 C22.2 34,47.15 33.5,47.15 | 39,46.75 39.15,46.75 C20.2 | 33.5,47.15 C19.2 31.5,46.4 C12.2 29.85,46.25 28,46.25 | v40.5,50.75 41.5,50.75 | 41.5,50.75 v42.25,50.75 | 39,46.75 39.35,46.4 C7.2 C13.2 43.85,46.4 44.25,46 | 33.5,47.15 33.4,47.05 C6.2 33.4,43.15 31.5,41.25 C11.2 | 15.5,49.4 15.5,54.25 15.5,57 | 29.5,50.75 29.5,51.75 42,51.75 42,51.25 41.5,50.75 | v28.5,42.75 29,42.75 29.6,42.15 C11.2 | C11.2 29.6,40.25 29.6,39.85 29.5,39.75 v28.5,39.75 | C1.1 58,19 | 58,19 C5.1 | 64,19 62,21 59.5,21 58,19.5 58,19 | 21.25,30 18.25,30 | v18.25,30.5 18.25,30 | 18.25,30 15.25,30 15.25,25.14 14.5,24.39 | 21.25,30 25,30 26.5,31.5 26.75,31.25 26.75,30.25 | 21.25,30 v21.25,30.5 | C34.2 15.5,49.4 | 15.5,57 34.25,57 34.25,62.75 32.5,64.5 31,64.5 30,65.5
  Bottom 0.254: SV3.2 15.11,57.39 15.5,57 | X3.SH1 21.5,75 23,76.5 X8.1 25,75 30,75 | R21.1 25.15,64.45 R19.1 R17.1 29.05,64.55 30,65.5 | 30,65.5 30,75 | X4.G1 31.5,70.73 31.5,75 30,75 | X4.8 46.37,73.63 46,74 43,74 | 43,74 34.5,74 33.5,73 33.5,70.5 32.5,69.5 | 23,12 23,10.28 X1.21 23.7,9.3 26,7 29.5,7 | 29.5,7 31.5,7 | 31.5,7 37,7 | 37,7 39,7 | 39,7 46.5,7 | 46.5,7 54,7 | 56,7 56,4.58 X1.4 | X1.5 54.18,7.18 54,7 | X1.9 46.56,7.06 46.5,7 | X1.13 38.94,7.06 39,7 | X1.14 37.03,6.96 37,7 | X1.17 31.32,7.18 31.5,7 | X1.18 29.41,6.92 29.5,7 | 54,7 56,7 | 56,7 60,7 | 60,7 64,7 64.5,7.5 64.5,13.5 65.5,14.5 | v51.75,56.75 50,58.5 | 50,58.5 49,59.5 49,66 51,66 | 51,66 53,66 | 53,66 53,74.5 43.5,74.5 43,74 | v56.25,50.25 56.88,50.88 56.25,51.5 55,50.5 53.75,49.25 | v41.5,26 41.5,25 52,25 52.5,25.5 | 52.5,25.5 v53,26 | C32.2 52.5,25.5 | v50.5,47.5 52,47.5 53.75,49.25 | C27.2 57.75,45.25 53.75,49.25 | C29.2 49,48 49.5,47.5 v50.5,47.5 | 50,47.5 v50.5,47.5 | 53,66 58.5,66 59.5,65 C38.1 59.55,64.5 60.5,64.5 64.4,60.6 C39.- 65.5,57 66,56.5 C41.2 | 51,66 C37.1 | C40.- 49.6,58.1 50,58.5 | 73.5,30.75 70.13,30.75 SV4.11 | 69.67,32.71 SV4.11 | 60,7 60,11.5 58.5,13 58.5,18.5 58,19 | SV2.6 67,33 67.5,32.5 SV4.11
  Bottom 0.406: 15.5,18 14.5,18 | C35.- 11,29.5 11,21.5 12,20.5 | 18.25,18 18.5,18 20,16.5 20,14.5 23,12 | 16.57,17.93 16.5,18 | X7.3 5.43,6.5 14,7.5 18.57,8.07 PWR_HDR.1 18.91,10 19,10 21.05,7.95
  Bottom 0.6: 1,58.5 1,48 | 1,45.5 1,37.75 | 1,32.59 1,32.75 | 26.75,30.25 26.75,32.5 26,32.5 25,33.5 25,35 25.6,35.6 27.15,35.6 | 1,45 1,8 3.93,8 X7.3 | C35.- 9,29.5 | U$5.1 4.09,36.59 3.5,36 3.25,36 2.5,36.75 | 18.25,18 16.5,18 14.5,18 | 14.5,18 14.5,24.39 | v11,20.5 12,20.5 12,18 14.5,18
  Bottom 0.61: v3.5,36.75 2.5,36.75 1,36.75 | 1,36.75 1,37.75 1,44.75 | 1,52.25 1,58.5 1,59.75 | 1,36.75 1,32.75 | 1,52.25 1,48 1,46 1,45.5 1,45 1,44.75 | v3.5,52.25 1,52.25 | v3.5,44.75 1,44.75
JOY0_DOWN
  Top 0.254: U1.P118 39.97,64.71 42.26,67 X4.2
  Bottom 0.254: 42.5,64.95 R41.2 43,64.95 43,65.5 42.26,66.24 X4.2
JOY0_FIRE1
  Top 0.254: U1.P116 40.97,63.97 43.75,66.75 43.75,70.4 X4.7
  Bottom 0.254: X4.7 43.63,66.87 44,66.5 44.5,66.5 45,66 R45.2
JOY0_FIRE2  (1 unrouted)
  Top 0.254: U1.P119 39.47,65.58 40.88,67 X4.6
  Bottom 0.254: X4.6 40.88,65.39 40.5,65
JOY0_LEFT
  Top 0.254: U1.P113 42.47,63.97 45,66.5 X4.3
  Bottom 0.254: X4.3 45.02,67.98 47,66 47,64.95 R42.2
JOY0_RIGHT
  Top 0.254: U1.P112 42.97,63.21 45.38,65.62 | 45.38,65.62 X4.4 | R43.2 46.25,64.75 45.38,65.62
JOY0_UP  (1 unrouted)
  Top 0.254: U1.P122 37.97,54.47 39,55.5 39,67.5 39.5,68
  Bottom 0.254: R40.2 38.25,66.72 X4.1
JOY1_DOWN  (1 unrouted)
  Top 0.2: 96.55,27.38 R39.1
JOY1_FIRE1  (1 unrouted)
  Top 0.2: 91.05,28.63 R35.1
JOY1_FIRE2  (1 unrouted)
  Top 0.2: 91.55,25.89 R36.1
JOY1_LEFT  (1 unrouted)
JOY1_RIGHT  (1 unrouted)
JOY1_UP  (1 unrouted)
N$1  (1 unrouted)
  Top 0.254: U1.P137 30.47,54.03 29.5,55 18,55 17.5,55.5 17.5,59.5
N$2
  Top 0.254: U1.P135 31.47,54.03 30,55.5 20.5,55.5 20,56 20,59.31 SV3.4
N$3
  Top 0.254: U1.P132 32.97,53.53 30.5,56 23,56 22.5,56.5 22.5,59.27 SV3.5
N$4
  Top 0.254: U1.P131 33.47,54.03 31,56.5 26,56.5 25.5,57 25.5,59.27 SV3.6
N$5
  Top 0.254: U1.P130 33.97,54.53 31.5,57 28,57 28,59.31 SV3.7
N$6
  Top 0.254: U1.P129 34.47,55.03 32,57.5 30.5,57.5 30.5,59.35 SV3.8
N$7
  Top 0.254: U1.P128 34.97,55.53 33,57.5 33,59.39 SV3.9
N$8  (1 unrouted)
  Top 0.254: 35.47,59.46 SV3.10 | U1.P125 36.47,53.53 36,54 36,56.5 35.5,57 35.5,59.5
N$9  (via drill 0.6)
  Top 0.254: IC3.27 64.94,47.19 72.5,54.75 v73,54.75
  Bottom 0.254: 72.75,54.75 v73,54.75 73,56.45 C41.1
N$12  (via drill 0.6)
  Top 0.254: v56,55 56,52.83 IC3.2
  Bottom 0.254: v56,55 53.5,57.5 | 53.5,57.5 52.5,58.5 52.5,62 | 52.5,62 52.5,62.04 Q1.1 | C37.2 51,62.5 52,62.5 52.5,62 | C40.+ 53.5,57.5
N$14  (via drill 0.6)  (1 unrouted)
  Top 0.254: IC3.1 57.54,52.42 57.54,54.96 v57.5,55
  Bottom 0.254: v57.5,55 57.5,57 | 57.5,57 57.5,62 57.75,62.25 | C39.+ 57.5,57 | C38.2 58.09,62.55 Q1.2
N$35
  Top 0.254: IC1.3 44.48,29.79 U1.P72
N$36  (1 unrouted)
  Bottom 0.254: X6.2 69.5,63.5 69,63 69.5,63
N$38
  Top 0.254: IC1.10 44.26,25.24 44,25.5 44,30.77 U1.P71
N$39  (1 unrouted)
  Top 0.254: U1.P110 43.97,53.97 44.5,54.5 45.5,54.5
N$40  (via drill 0.6)
  Top 0.2: U1.P143 27.47,51.03 v27.75,50.75
  Top 0.254: IC1.7 50.06,27.19 v50.25,27
  Bottom 0.2: v27.75,50.75 27.5,51 27.5,52.25 44.75,52.25 45.75,51.25 46.75,51.25 47,51
  Bottom 0.254: 47,51 47,27.25 49.75,27.25 v50.25,27
N$42  (via drill 0.6)
  Top 0.2: v25.75,52.25 26.92,52.25 U1.P144
  Bottom 0.2: R1.1 25.46,51.96 v25.75,52.25
N$43
  Top 0.254: U1.P111 43.47,55.16 R3.1
N$49  (via drill 0.6)
  Top 0.254: IC3.29 63.82,48.32 72,56.5 v72,59.5
  Bottom 0.254: v72,59.5 72,60.8 R54.2
N$50
  Top 0.254: REG2.5.2 5.65,50.25
N$51  (via drill 0.6)  (1 unrouted)
  Top 0.254: R23.2 54.2,20.8 v54,20.5
  Bottom 0.254: R48.1 53.8,18.8 54,19 | C1.2 53.9,20.4 v54,20.5
N$52
  Bottom 0.254: C3.1 56,16.5 55.75,16.75 R48.2
N$53  (via drill 0.6)
  Top 0.254: v37,19 37,18.55 R10.2 R9.2
  Bottom 0.254: v37,19 35.2,19 Q6.1
N$54
  Bottom 0.254: R15.2 R20.2 R16.2 Q6.2
N$55  (via drill 0.6)
  Top 0.254: v45,19 45,18.55 R25.2 R24.2
  Bottom 0.254: v45,19 42.95,19 Q8.1
N$56
  Bottom 0.254: R26.2 R27.2 R28.2 Q8.2
N$57  (via drill 0.6)
  Top 0.254: v52.5,19 52.5,18.55 R30.2 R29.2
  Bottom 0.254: v52.5,19 50.45,19 Q7.1
N$58
  Bottom 0.254: R31.2 R32.2 R33.2 Q7.2
N$59
  Bottom 0.254: R13.2 R14.2 Q5.2
N$60
  Bottom 0.254: T2.1 20.35,66.4 R18.1 22.65,66.55 C2.2 25.05,66.65 R19.2
N$61
  Bottom 0.254: X8.5 X8.4 20.6,70.9 21,70.5 22.75,70.5 | X8.2 X8.3 25.4,70.9 25,70.5 22.75,70.5 | 23,68.5 22.9,68.5 C2.1 | R17.2 27.75,68.5 23,68.5 | 23,68.5 22.75,68.75 22.75,70.5
N$62  (1 unrouted)
  Bottom 0.254: R22.2 20.45,68.45 20.5,68.5 20,68.5
N$63  (via drill 0.6)
  Top 0.254: R8.2 29.5,18.05 v29.5,19
  Bottom 0.254: v29.5,19 27.7,19 Q5.1
N$64
  Bottom 0.254: C4.1 61.75,16.25 62,16.5 61.75,16.75 R49.2
N$65  (via drill 0.6)  (1 unrouted)
  Top 0.254: v61.5,20 59.95,21.55 57.05,21.55 57,21.5
  Bottom 0.254: v61.5,20 61.5,19 C5.2 61.45,19 R49.1
N$66
  Bottom 0.254: X6.3 70.46,67.54 71.5,66.5 71.5,63.2 R54.1
N$67
  Top 0.254: U$6.P1 22.25,50.5 22.5,50.25 U1.P1
N$68  (via drill 0.6)
  Top 0.254: v69.5,59.5 69.5,55.2 IC3.30
  Bottom 0.254: v69.5,59.5 69.5,60.8 R53.2
N$69  (via drill 0.6)
  Top 0.254: v73.5,59.5 73.5,56.93 IC3.28
  Bottom 0.254: X6.4 67,68 69,70 70.5,70 73.5,67 v73.5,59.5
N$71
  Top 0.254: U$6.P2 21.75,50 22,49.75 U1.P2
N$72
  Top 0.254: U$6.P3 21.25,49.5 22,48.75 U1.P4
N$73
  Top 0.254: U$6.P4 20.75,49 21.5,48.25 U1.P5
N$74
  Top 0.254: U$6.P5 20.25,48.5 21,47.75 U1.P6
N$75
  Top 0.254: U$6.P6 19.75,48 20.5,47.25 U1.P7
N$76
  Top 0.254: U$6.P7 19.25,47.5 20,46.75 U1.P8
N$77
  Top 0.254: U$6.P9 18.25,46.5 19,45.75 U1.P10
N$78
  Top 0.254: U$6.P10 17.75,46 18.5,45.25 U1.P11
N$79
  Top 0.254: U$6.P11 17.25,45.5 18,44.75 U1.P12
N$80
  Top 0.254: U$6.P12 16.75,45 17.5,44.25 U1.P13
N$81
  Top 0.254: U$6.P13 16.25,44.5 17,43.75 U1.P14
N$82
  Top 0.254: U$6.P14 15.75,44 16.5,43.25 U1.P15
N$83
  Top 0.254: U$6.P15 15.25,43 16,42.25 U1.P17
N$84
  Top 0.254: U$6.P16 14.75,42.5 15.5,41.75 U1.P18
N$85
  Top 0.254: U$6.P17 14.75,39 16.5,40.75 U1.P20
N$86
  Top 0.254: U$6.P18 15.25,38.5 17,40.25 U1.P21
N$87
  Top 0.254: U$6.P19 15.75,37.5 17.5,39.25 U1.P23
N$88
  Top 0.254: U$6.P20 16.25,37 18,38.75 U1.P24
N$89
  Top 0.254: U$6.P21 16.75,36.5 18.5,38.25 U1.P25
N$90
  Top 0.254: U$6.P22 17.25,36 19,37.75 U1.P26
N$91
  Top 0.254: U$6.P23 17.75,35.5 19.5,37.25 U1.P27
N$92
  Top 0.254: U$6.P25 18.75,35 20.5,36.75 U1.P28
N$93
  Top 0.254: U$6.P26 19.25,34.5 20.5,35.75 U1.P30
N$94
  Top 0.254: U$6.P27 19.75,34 21,35.25 U1.P31
N$95
  Top 0.254: U$6.P28 20.25,33.5 21.5,34.75 U1.P32
N$96  (1 unrouted)
  Top 0.254: U$6.P29 20.75,33 22,34.25 25,34.25
N$97
  Top 0.254: U$6.P31 21.75,33 22,33.25 U1.P35
N$98
  Top 0.254: U$6.P32 22.25,32.5 22.5,32.75 U1.P36
N$99  (1 unrouted)
  Top 0.254: U1.P40 28.5,30.3 28.5,29.5 28,29 17.65,29 17.65,25.04
N$100  (1 unrouted)
  Top 0.254: U1.P41 29,30.3 29,29 28.5,28.5 20.19,28.5 20.19,25.04
N$101  (1 unrouted)
  Top 0.254: U1.P44 30.5,30.3 30.5,29.5 29,28 22.75,28 22.75,25.06
PC2  (1 unrouted)
  Top 0.254: U1.P100 51.75,46.25 54.5,49 56.5,49 57.5,48
PC4  (1 unrouted)
  Top 0.254: IC3.26 65.45,46.7 66.25,47.5 67.75,47.5 69.75,45.5
PC5
  Top 0.254: IC3.25 66.52,45.48 68,44 70.94,44 72.27,45.33 SV4.2
PD0
  Top 0.254: U1.P99 52.25,45.75 54.5,48 56.3,48 IC3.6
PD1
  Top 0.254: U1.P98 52.75,45.25 55,47.5 55.67,47.5 IC3.7
PD2
  Top 0.254: U1.P97 53.25,44.75 55,46.5 55.54,46.5 IC3.8
PD3
  Top 0.254: U1.P95 55.79,43.75 IC3.9
PD4  (1 unrouted)
  Top 0.254: U1.P93 55.75,42.75 56.5,43.5
PD5
  Top 0.254: U1.P92 56.55,42.25 IC3.11
PD6
  Top 0.254: U1.P96 54.75,44.25 55.5,45 57,45 58.5,43.5 58.5,43.07 IC3.12
PROM_DO  (via drill 0.6)  (1 unrouted)
  Top 0.254: IC1.1 47.5,31.09 | v45.5,31 47.5,31 | U1.P65 41,30.27 v41,29.25
  Bottom 0.254: v41,29.25 41,31 v45.5,31
PROM_INITB  (via drill 0.6)
  Top 0.254: U1.P58 37.47,31.97 37.5,32 37.25,32.25 v36.25,32.25 | v45,26.5 47.41,26.5 IC1.8
  Bottom 0.254: v36.25,32.25 37.25,32.25 37.5,32 37.5,28 45,28 v45,26.5
PS2CLK  (via drill 0.6)
  Top 0.2: v3.5,57.5 8.5,57.5
  Top 0.254: U1.P141 28.47,53.53 28,54 9.5,54 8.5,55 8.5,57.5
  Bottom 0.2: v3.5,57.5 5.5,57.45 R4.1 5.55,59.45 5.5,59.5 5.31,59.31 | T1.2 5.31,59.31 | 5.31,59.31 5,59 3.55,59 R47.2
PS2DAT  (via drill 0.6)
  Top 0.2: v7.5,63 8.5,62.5 9,62.5
  Top 0.254: U1.P140 28.97,54.03 28.5,54.5 10,54.5 9,55.5 9,62.5
  Bottom 0.2: R51.2 7.82,64.73 T3.2 R6.1 9.5,62.45 8.5,62.5 v7.5,63
R0
  Top 0.254: U1.P56 36.47,26.28 36.75,26 36.75,23.75 35.5,22.5 R10.1
R1
  Top 0.254: U1.P53 34.97,26.97 34.25,26.25 34.25,23.75 33,22.5 R9.1
RESET  (1 unrouted)
SAA  (1 unrouted)
  Top 0.254: U1.P52 34.47,27.47 33,26 33,25
SCART_BLANKING
  Top 0.254: R50.1 33.8,13.8 33.23,13.22 X1.16
SCART_BLUE
  Bottom 0.254: R33.1 R32.1 R31.1 50.45,9.66 X1.7
SCART_COMP  (1 unrouted)
  Bottom 0.254: R14.1 R13.1 27.7,9.7 27.5,9.5
SCART_GREEN
  Bottom 0.254: R28.1 R27.1 R26.1 42.95,9.78 X1.11
SCART_LEFT
  Bottom 0.254: X1.3 57.1,10.47 57.1,11.4 56,12.5 C3.2
SCART_RED
  Bottom 0.254: R16.1 R20.1 R15.1 35.2,9.65 X1.15
SCART_RIGHT
  Bottom 0.254: C4.2 61.75,9.63 X1.1
SPI_MISO  (1 unrouted)
  Top 0.254: SV2.4 63.87,38.13 62,40
SPI_MOSI
  Top 0.254: IC3.16 60,39 61.25,37.75 SV2.2
SPI_SCLK
  Top 0.254: SV2.3 62.07,35.93 58.75,39.25 58.75,39.92 IC3.15
SPI_SEL
  Top 0.254: SV2.1 57,39.25 57,39.3 IC3.14
TCK  (via drill 0.6)  (1 unrouted)
  Top 0.254: IC1.6 50.34,27.84 50.8,28.3 50.8,32.8 56,38 v56,39 | R2.2 47.17,55.67 49.25,57.75 58.5,57.75 58.5,54 v61.5,51 | IC3.19 66.59,37.71 66.61,37.73 SV4.7 | 63.25,41 62.25,42 62.25,43.25 61.5,44 v61,44
  Bottom 0.254: v61.5,51 64,48.5 64,46.5 61.5,44 v61,44 60.5,44 56,39.5 v56,39
TDI_FPGA  (via drill 0.6)
  Top 0.254: v61.5,46 61.5,45 64.25,42.25 IC3.21 64.32,42.18 65,41.5 71,41.5 72.27,42.77 SV4.4
  Bottom 0.2: R1.2 25.56,50.06 27,51.5 27,52.75 56.25,52.75
  Bottom 0.254: 56.25,52.75 57.25,52.75 61.5,48.5 v61.5,46
TDO_EXP
  Top 0.254: IC3.23 65.45,43.3 65.7,43.3 66.5,42.5 69.44,42.5 69.73,42.79 SV4.3
TDO_FPGA  (via drill 0.6)
  Top 0.254: U1.P109 44.47,51.22 44,50.75 v43.75,50.75 | IC1.4 45.39,29.14 v45.25,29
  Bottom 0.254: v43.75,50.75 46.25,50.75 46.5,50.5 46.5,29 v45.25,29
TDO_PROM  (via drill 0.6)
  Top 0.254: IC1.17 51.86,29.14 51.5,29.5 51.5,32.5 v56,36.5 | 64,41.5 63.93,41.5 IC3.20 64.93,40.5 v65.5,40.5 65.23,40.27 SV4.5
  Bottom 0.254: v56,36.5 56.5,36.5 62.5,42.5 63,42.5 65,40.5 v65.5,40.5
TMS  (via drill 0.6)  (1 unrouted)
  Top 0.254: R3.2 46.1,57.85 46.5,58.5 59,58.5 59.5,58 59.5,54.5 v61.5,52.5 | v61,42.75 60.92,42.25 IC3.18 | v54.5,38 50,33.5 50,28.5 48.46,28.5 IC1.5 | SV4.9 69.52,35.19 68.5,35.17 68.08,35.17 62.75,40.5
  Bottom 0.254: v61.5,52.5 65,49 65,46.5 61,42.5 | 61,42.5 v61,42.75 | v54.5,38 56.5,38 61,42.5
VCC  (via drill 0.6)  (16 unrouted)
  Top 0.2: R46.2 98.45,26 | 98.45,26 R39.2 98.45,28.75 | 98.45,28.75 R38.2 R37.2 | R35.2 98.45,28.75 | R36.2 98.45,26 | U$6.P8 18.75,52.75 v19,52.5 | 8,54 8.25,53.75
  Top 0.254: IC1.20 IC1.19 IC1.18 53.71,29.79 v53,30.5 | 41.5,30.27 U1.P66 41.5,30.33 41.5,33.25 v41.75,33.25 42.25,33.75 v44.75,33.75 U1.P75 | U1.P19 v26.5,41.25 27,40.75 31,40.75 31.5,41.25 32,41.25 | U1.P3 v26.5,49.25 | U1.P138 29.97,50.03 v30,49.5 29.75,49.25 v26.5,49.25 | v44.75,41.75 U1.P91 55.75,41.75 v56.25,41.25 | U1.P126 35.97,46.72 v36.5,46.25 | 26.75,49.5 v26.5,49.25 | v35,42.75 33.5,41.25 v34.5,40.25 | U1.P54 35.47,36.22 v36,36.75 | U1.P106 44.5,49.25 | U1.P43 29.97,33.25 29.97,33.47 v30.25,33.5 | U1.P34 26.5,33.75 v26.5,34.25 | v40.75,49.5 41.5,49.25 41.47,49.28 U1.P115 | 12.53,32.97 11.5,34 | v19.5,22 13.5,22 12.5,23 12.5,24.97 | v19,52.5 19,52.75 | 8.5,52.75 8.5,53.5 8,54 v7.5,54.5 | v16,67.5 16.48,67.47 U$2.VDD 17.12,65 v35,65 | 47.25,53 47.66,53 IC2.8 | IC3.4 58.25,48.25 59,47.5 59.54,47.5 | 59.54,47.5 IC3.32 | IC3.32 IC3.31 | IC3.32 62.02,50.02 | 59.54,47.5 60.25,47.5 v60.5,47.25 | v46.75,52 46.62,52.38 | R43.1 46.25,62.75 45,61.5 v45,61 | 74,34.95 R55.1 75,35 | 74,34.95 72.55,34.95 72.25,35.25 | 74,34.95 74,46 73,47 v71,47 | v64,51.5 64,51 62.5,49.5
  Top 0.6: 32,41.25 29,44.25 29,47.75 27,47.75 27,48.75 v26.5,49.25 26.5,51 25,51 24.5,51.5 24.5,52.75 19,52.75 18.75,52.75 8.5,52.75 8.5,35.5 9.25,34.75 12.5,34.75 | 32,41.25 32,39.75 29,36.75 29,33.25 | 32,41.25 33.5,41.25 v38.5,41.25 | v40.75,49.5 41.25,49.5 41.25,43.5 40.5,42.75 v40.5,41.25 40.5,40 41.5,39 | 41.5,39.25 41.5,39 | 41.5,39 41.5,33.5 v41.75,33.25 | 47.25,53 46.62,52.38 44.75,50.5 44.75,49.25 44.5,49.25 41.5,49.25 | 29,33.25 27,33.25 27,32.75 26,31.75 v24.75,31.75 | 29,33.25 29.97,33.25 | U$4.4 11.6,34.9 11.9,34.9 12,35 12.5,35 12.5,34.75 | 12.5,34.75 13.5,35.75 v13.5,38.5 | v13.75,32 13.75,32.75 12,34.5 11.5,34.5 11.5,34
  Bottom 0.2: T3.3 11.49,62.54 R6.2 11.45,61.45 11,61 8.5,61 7.97,60.52 8,59.75 T1.3 7.45,59.52 R4.2 7.45,54.55 v7.5,54.5
  Bottom 0.254: v26.5,49.25 28,49.25 27.75,49 C9.1 | v44.75,33.75 43.5,33.75 43,34.25 | v41.75,33.25 41,33.75 41,34.4 C8.1 41.5,34.4 C17.1 | v36,36.75 35.5,37.25 C15.1 34.6,40.15 v34.5,40.25 | v30,49.5 30,48.25 | 30,48.25 28.1,48.25 28.1,49.15 | v40.75,49.5 41.25,48.5 41.5,48.25 41.35,48.1 C7.1 C13.1 | v36.5,46.25 36,46.25 35,45.25 | v35,42.75 35,45.25 | v40.5,41.25 40.5,41.75 43,41.75 | 43,41.75 43.5,41.75 | 43.5,41.75 v44.75,41.75 | 43.4,41.85 43.5,41.75 | v30.25,33.5 C14.1 30,34.75 29,33.75 27.9,33.75 C16.1 27.6,33.75 27,33.75 v26.5,34.25 | C11.1 v26.5,41.25 | C10.1 43,41.75 | 35,45.25 C6.1 | C12.1 30,48.25 | v19.5,22 27,22 | 27,22 34.5,22 | 34.5,22 42,22 | 42,22 49.5,22 | 49.5,22 67,22 | Q5.3 26.65,21.5 26.5,21.5 26.6,22.1 27,22.1 27,22 | Q6.3 34.5,21.6 34.5,22 | Q8.3 42,22 | Q7.3 49.5,22 | v19,52.5 C34.1 | SV3.1 12.5,59.5 11,61 | v16,67.5 16,68 | 16,68 13.5,68 13,67.5 13,65 12.5,64.5 11.72,64.5 T3.3 | 16,68 16.5,68 17,67.5 16.95,66.55 R22.1 18.25,66.5 18.15,66.4 T2.3 | R42.1 R45.1 | R45.1 R41.1 R44.1 R40.1 | R45.1 37.2,62.8 v35,65 | v56.25,41.25 56.75,41.25 60.5,45 v60.5,47.25 60.25,47.25 59.5,46.5 | C29.1 49,52 v46.75,52 | v45,61 45,63 | v71,47 69.5,47 64,51 v64,51.5 | v53,30.5 53,29.5 52.5,29
  Bottom 0.406: SV1.1 12.57,31.07 13.5,32
  Bottom 0.6: v38.5,41.25 v40.5,41.25 | U$5.3 5.9,38.6 6,38.5 11.1,38.5 v13.5,38.5 | v24.75,31.75 14,31.75 v13.75,32
  Bottom 0.61: U$5.3 U$5.2 | U$5.6 11.1,38.5 U$5.7
VCC5  (via drill 0.6)  (2 unrouted)
  Top 0.2: v3.5,31 3.5,32.19 | v12,67 2.5,67 2.5,66 | 2.5,66 2.5,55 | v3.25,66 2.5,66
  Top 0.4: 2.5,55 2.5,54.5
  Top 0.406: 4,14 5.5,15.5 15,15.5 16,14.5 16,13
  Top 0.6: 2.5,48.25 2.5,54.5 | 3.85,28.15 2.5,29.5 2.5,32 3.31,32 3.5,32.19 | C36.+ 4,20.5 | 4,20.5 4.08,20.5 | 4,20.5 4.5,20 4.5,14.27 X7.2 | 4,39.94 3.94,40 | 3.94,40 2.5,40 | REG2.5.3 5.09,48 2.5,48 | 3.94,40 3.5,40.44 v3.5,41
  Top 0.61: U$4.3 3.5,32.19 | REG1.2.3 4,39.94 | 2.5,32 2.5,40 2.5,48 2.5,48.25
  Top 0.813: 4.08,20.5 4.08,27.27 C33.+ 3.85,28.15
  Bottom 0.2: C35.+ 3.5,29.6 v3.5,31 | X3.5 9.95,69.55 R7.2 9.95,69.05 v12,67 | R5.2 v3.25,66
  Bottom 0.6: U$5.4 3.6,40.41 v3.5,41
  Bottom 0.813: C35.+ 4.08,29.5
VCCAUX  (via drill 0.6)
  Top 0.254: 32.5,32.25 v32,32.25 | 39.5,33.25 39.5,30.33 U1.P62 39.5,30.77 39.5,27.25 v39.25,27 | 39.5,33.25 39.5,39.25 33.5,39.25 32.5,38.25 32.5,32.25 | U1.P48 32.5,30.33 32.5,32.25 | v38.5,33.5 39,33.25 39.5,33.25 | U1.P134 31.97,50.75 | 31.97,50.75 31.97,50.53 v32,50.25 | U1.P120 38.97,50.72 | 38.97,50.72 39.5,50.25 39.5,43.75 | 31.97,50.75 32.47,50.25 32.5,50.25 32.5,43.75 | 38.97,50.72 38.97,49.78 v39,49.75 | R50.2 38,21.5 37.5,22 v37.5,23
  Top 0.6: 39.5,39.25 39.5,43.75 32.5,43.75 32,44.25 v31.5,44.25 | 11,49.25 11.5,49.75 12,49.75 12,49.5 | 12,49.5 11.6,49.5 REG2.5.4 | v13.5,48.5 13,48.5 12,49.5
  Bottom 0.254: C21.1 32,33.15 v32,32.25 | C18.1 38.5,34.4 v38.5,33.5 | C19.1 32,49.6 v32,50.25 | 39,48.25 C20.1 v39,49.75 | v37.5,23 37.5,26.75 37.75,27 v39.25,27
  Bottom 0.6: v31.5,44.25 26.5,44.25 26.5,42.75 14.25,42.75 14,43 14,48 v13.5,48.5
VCCINT  (via drill 0.6)  (2 unrouted)
  Top 0.254: U1.P61 39,30.33 39,32.25 v38.5,32.25 38,32.25 37,33.25 37,37.75 33,37.75 33,32.25 | U1.P49 33,30.33 33,32.25 | 33,32.25 v33.75,32.25 | U1.P133 32.47,51.28 33,50.75 v34,50.75 | 38,50.75 38.5,51.25 38.5,52.25
  Top 0.6: v37,50.75 38,50.75 38,45.75 v37,44.75 | 37,37.75 v37,38.25 | v13.5,41 13,41 11.5,42.5
  Bottom 0.254: v38.5,32.25 38,32.25 37.25,33 | v33.75,32.25 34.5,32.25 34.5,33.5 | 37.25,33 C25.1 | 34.5,33.5 37,33.5 37,33.25 37.25,33 | 34.5,33.5 C24.1 | 36.75,50.5 v37,50.75
  Bottom 0.6: v37,50.75 v34,50.75 34.5,50.25 C22.1 | C23.1 36.75,50.5 | v37,38.25 37,41.25 | 37,41.25 v37,44.75 | 37,41.25 33.5,41.25 31,38.75 26.5,38.75 26.5,39.75 15,39.75 v13.5,41
XXX  (1 unrouted)
  Top 0.254: U1.P55 35.97,25.47 35.5,25